# Altium PCB PCB2.PcbDoc
Units mm, origin at the board's own origin, x right, y up, seen from the top; angles counter-clockwise.
Board outline 72.01 x 60.45 mm, 2 copper layers (Top Layer, Bottom Layer); 58 components, 46 nets, 217 pads, 32 vias.
Unrouted connection lines stored in the file: 1.
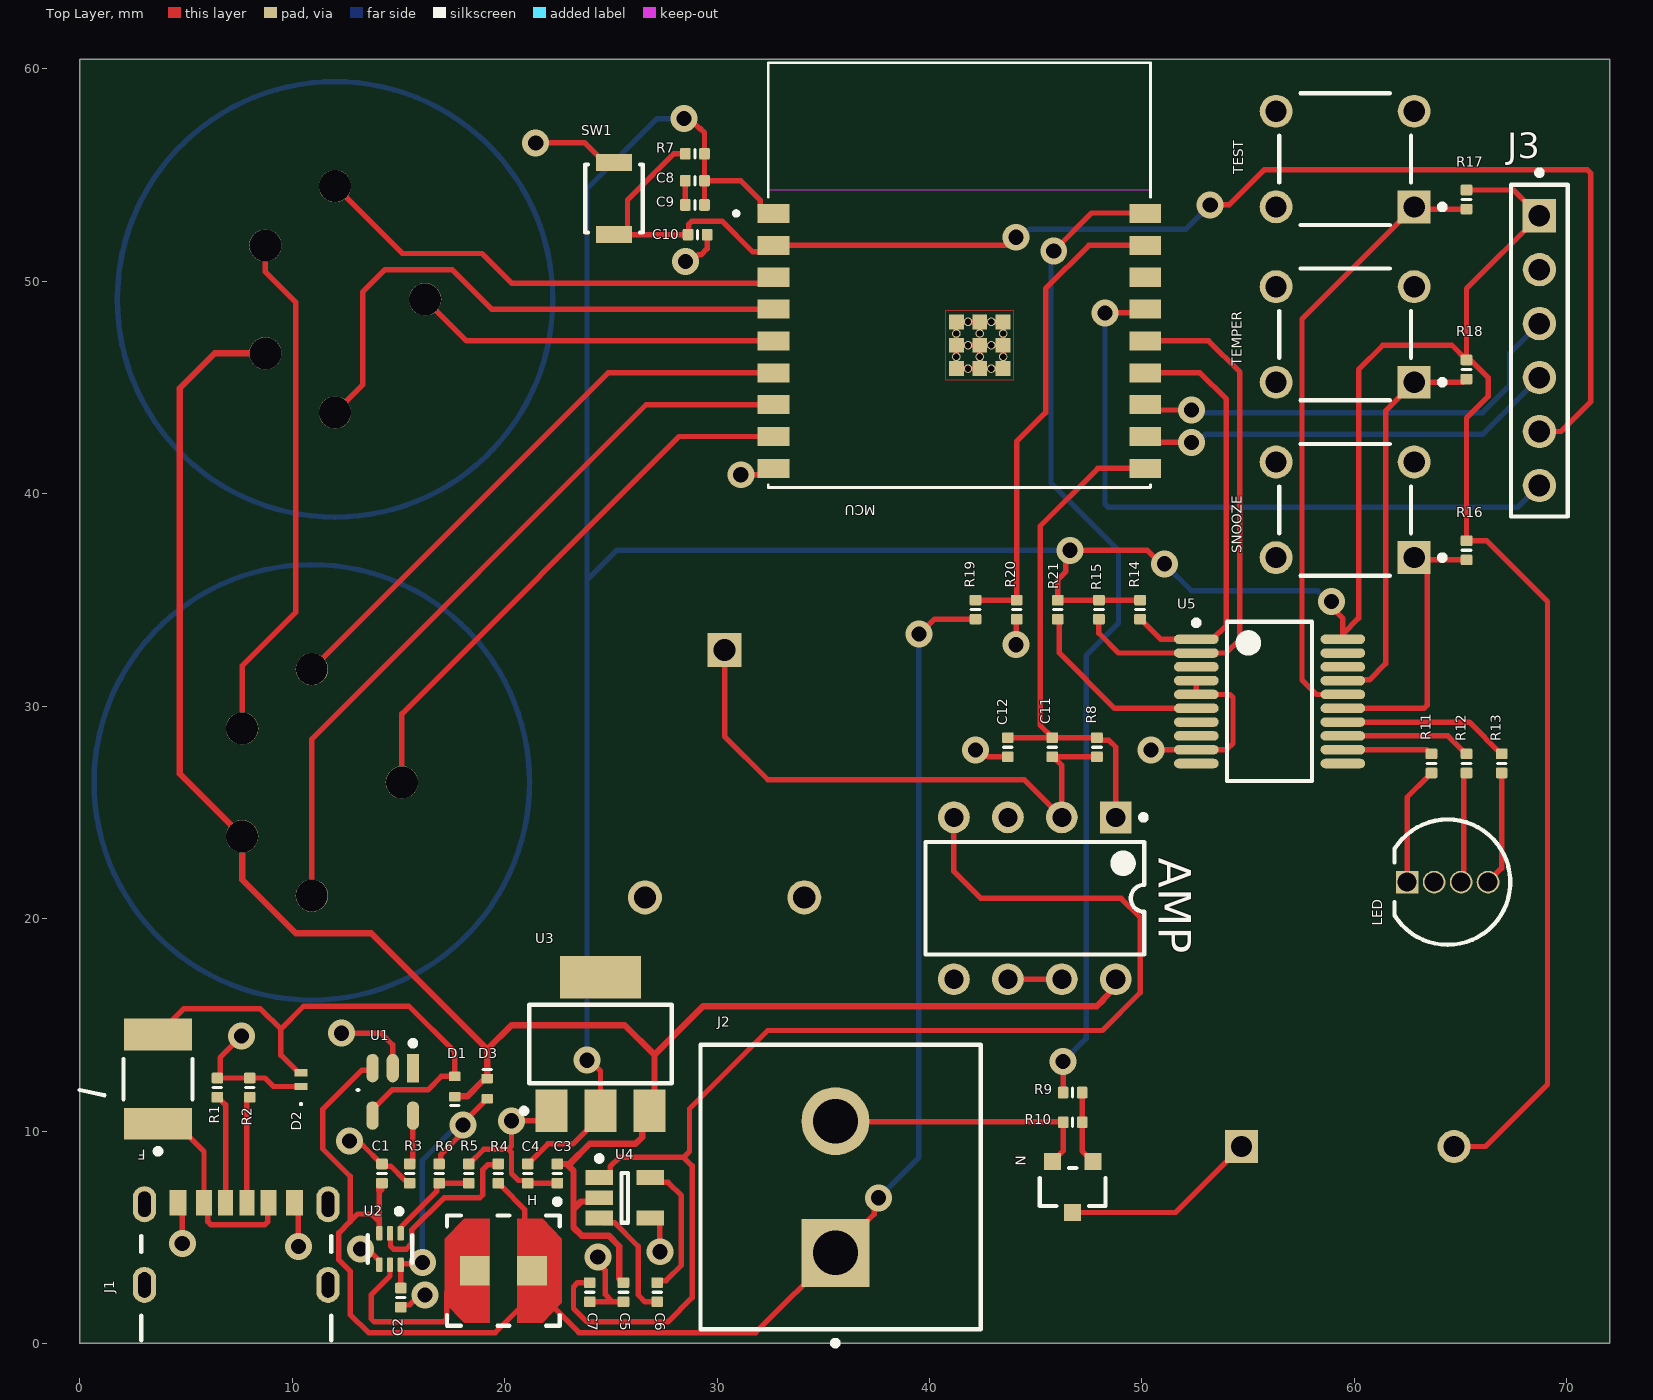
[diagram p0: Top Layer view]
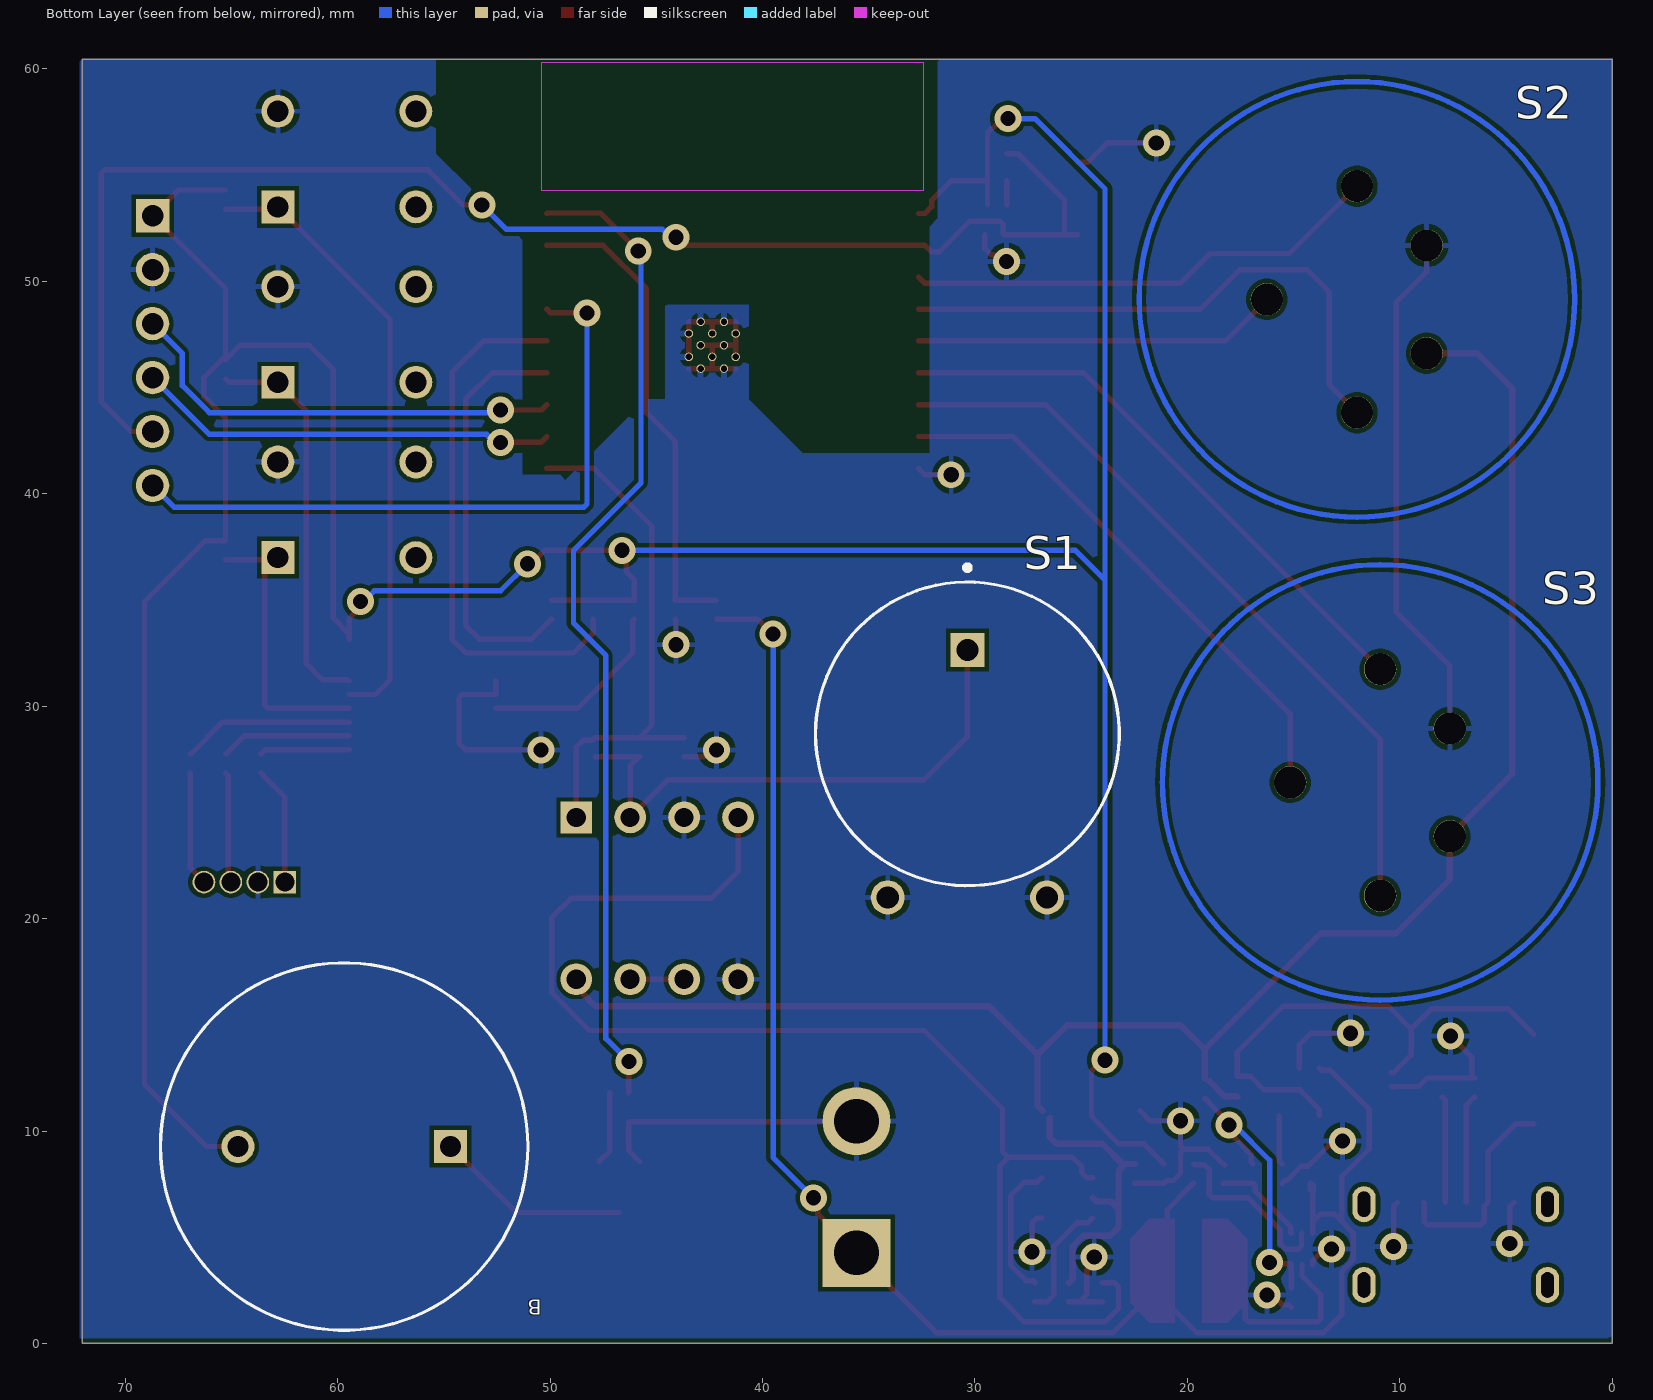
[diagram p1: Bottom Layer view, seen from below]
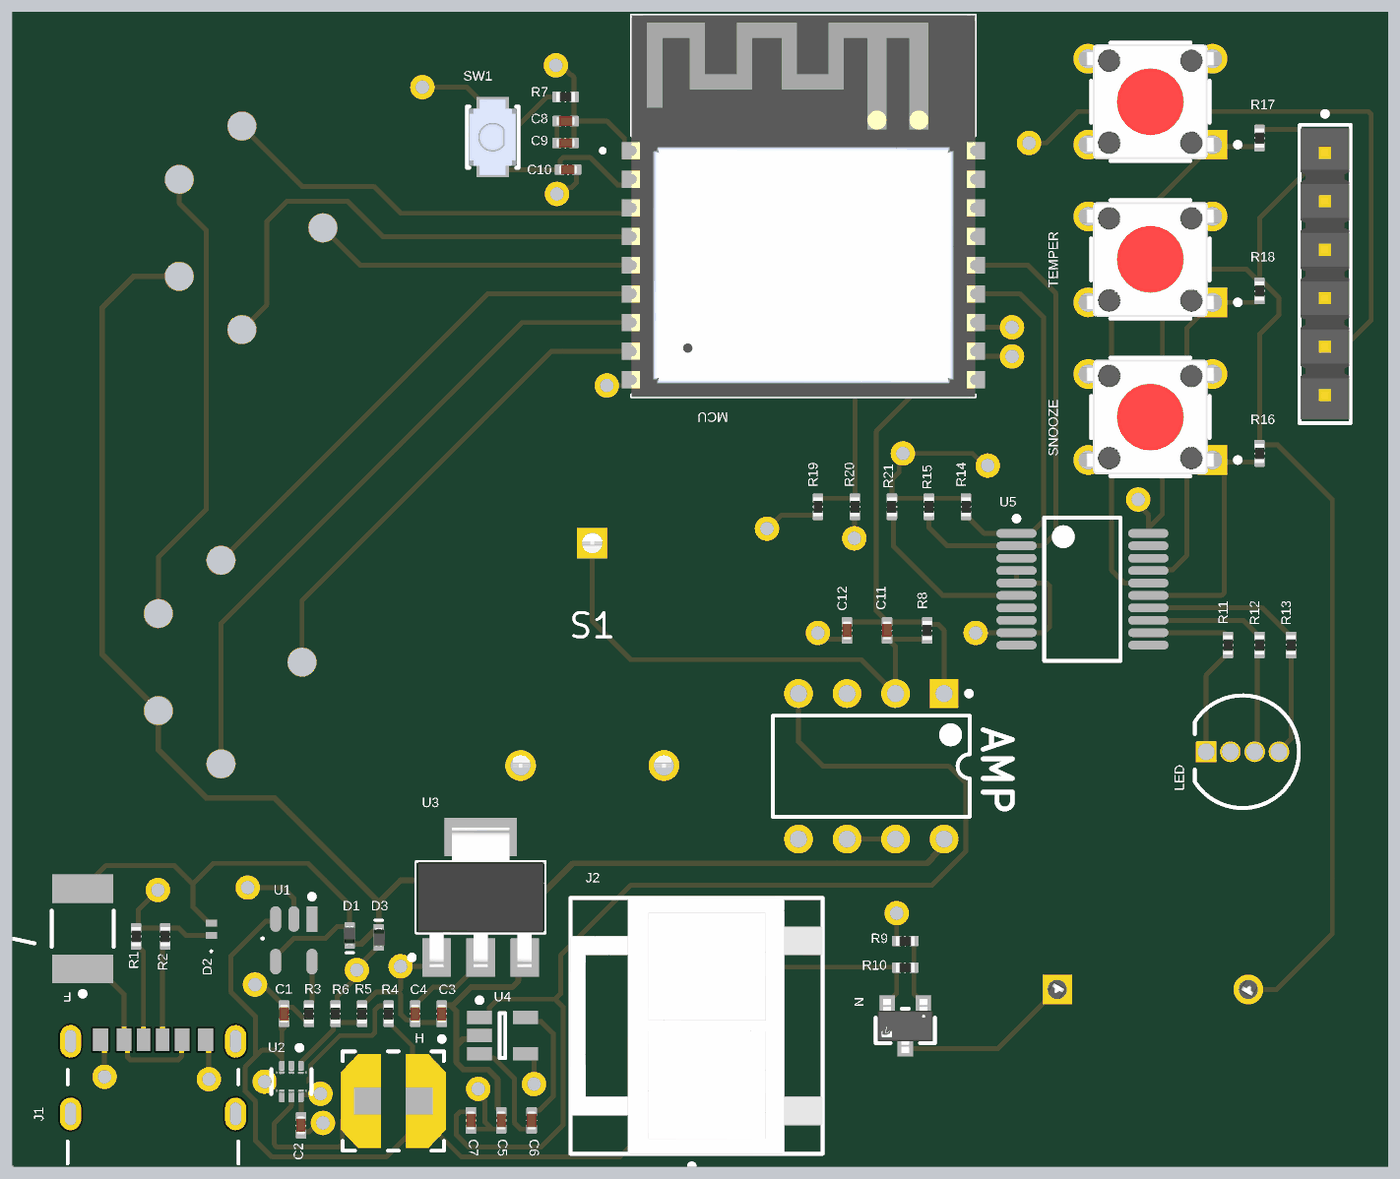
[diagram p2: 3D render of the assembled board from above, using the file's embedded part models]

## Layer stack, top to bottom
Top Solder: solder mask 0.0102, Solder Resist, Dk 3.5
Top Layer: signal copper 0.0356
Dielectric 1: dielectric 0.32, FR-4, Dk 4.8
Bottom Layer: signal copper 0.0356
Bottom Solder: solder mask 0.0102, Solder Resist, Dk 3.5

## Board outline
0,0 0,60.452 72.009,60.452 72.009,0

## Design rules (kind name [scope] priority, off if disabled: settings)
Clearance [All] p1: gap=0.2 ignorepadtopadclearanceinfootprint=TRUE
MinimumSolderMaskSliver J1_SolderMask_Sliver [All] p1: minsoldermaskwidth=0.07
PolygonConnect [All] p1: connectstyle=Relief reliefconductorwidth=0.254 reliefentries=4 polygonreliefangle="90 Angle" airgapwidth=0.254
RoutingVias [All] p1: holewidth=0.711 width=1.27 viastyle="Through Hole" minholewidth=0.711 minwidth=1.27 maxholewidth=0.711 maxwidth=1.27
SilkToSolderMaskClearance [IsPad] p1: minsilkscreentomaskgap=0.1 clearancetoexposedcopper=TRUE
SolderMaskExpansion [All] p1: expansion=0 istentingtop=FALSE
SupplyNets "Schematic Supply Nets" [InNet('GND')] p1: voltage=0.000
Width [InNet('5V')] p1: maxlimit=0.3 minlimit=0.254 preferedwidth=0.3
28 further rules are at their usual default settings.

## Components (designator, comment, footprint, x,y, rotation, side; value= is the part's Value field where it differs from the comment)
AMP "AD708SQ/883B" ADI-Q-8 44.958,20.955 r270 top locked
B "PS1740P02E" FP-PS1740P02E-MFG 59.69,9.271 r0 bottom locked
C1 "Capacitor 1nF +/-20% 50V 0402" CAPC0402(1005)33_L 14.224,8.001 r270 top value=10uF
C2 "Capacitor 1nF +/-20% 50V 0402" CAPC0402(1005)33_L 15.113,2.159 r270 top value=22uF
C3 "Capacitor 1nF +/-20% 50V 0402" CAPC0402(1005)33_L 22.479,8.001 r270 top locked value=10uF
C4 "Capacitor 1nF +/-20% 50V 0402" CAPC0402(1005)33_L 21.088,8.001 r270 top locked value=10uF
C5 "Capacitor 1nF +/-20% 50V 0402" CAPC0402(1005)33_L 25.59,2.413 r270 top value=1uF
C6 "Capacitor 1nF +/-20% 50V 0402" CAPC0402(1005)33_L 27.178,2.413 r270 top locked value=1uF
C7 "Capacitor 1nF +/-20% 50V 0402" CAPC0402(1005)33_L 24.003,2.413 r270 top locked value=1uF
C8 "Capacitor 1nF +/-20% 50V 0402" CAPC0402(1005)33_L 28.956,54.737 r180 top locked value=100nF
C9 "Capacitor 1nF +/-20% 50V 0402" CAPC0402(1005)33_L 28.956,53.594 r180 top locked value=10uF
C10 "Capacitor 1nF +/-20% 50V 0402" CAPC0402(1005)33_L 29.083,52.197 r0 top locked value=10nF
C11 "Capacitor 1nF +/-20% 50V 0402" CAPC0402(1005)33_L 45.783,28.067 r90 top locked value=1uF
C12 "Capacitor 1nF +/-20% 50V 0402" CAPC0402(1005)33_L 43.688,28.067 r90 top locked value=1uF
D1 "RB520CM-30" ROHM-VMN2-2_V 17.653,12.096 r90 top locked
D2 "ESD05V88D-LC" ESD05V88DLC 10.414,12.421 r90 top locked
D3 "RB520CM-30" ROHM-VMN2-2_V 19.177,11.996 r270 top locked
F "MF-MSMF075-2" BOUR-MF-MSMF050-2_V 3.683,12.446 r90 top locked
H "VLCF5028T-2R7N1R8-2" TDK-VLCF5028-2_V 19.939,3.429 r270 top value=1µH
J1 "USB4970-00-A_REVA" GCT_USB4970-00-A_REVA 7.366,3.556 r0 top locked
J2 "B02P-VL (LF)(SN)" FP-B02P-VL_LF_SN-MFG 35.814,7.366 r270 top locked
J3 "MTSW-106-22-L-S-409" FP-MTSW-106-22-L-S-409-MFG 68.707,46.736 r90 top locked
LED "WP154A4SUREQBFZGC" KING-WP154A4SUREQBFZGC_V 64.389,21.717 r90 top locked
MCU "ESP32-C3-WROOM-02-H4" MODULE_ESP32-C3-WROOM-02-H4 41.402,50.292 r0 top locked
N "AO3400A" FP-SOT23-MFG 46.736,7.366 r270 top locked
R1 "Resistor 100K +/-1 % 0402 63 mW" RESC0402(1005)_L 6.477,12.046 r270 top locked value=5.9k
R2 "Resistor 100K +/-1 % 0402 63 mW" RESC0402(1005)_L 8.001,12.046 r270 top locked value=5.9k
R3 "Resistor 100K +/-1 % 0402 63 mW" RESC0402(1005)_L 15.526,8.001 r90 top locked value=2k
R4 "Resistor 100K +/-1 % 0402 63 mW" RESC0402(1005)_L 19.698,8.001 r90 top locked value=100k
R5 "Resistor 100K +/-1 % 0402 63 mW" RESC0402(1005)_L 18.307,8.001 r90 top locked value=100k
R6 "Resistor 100K +/-1 % 0402 63 mW" RESC0402(1005)_L 16.916,8.001 r270 top locked value=732
R7 "Resistor 100K +/-1 % 0402 63 mW" RESC0402(1005)_L 28.956,56.007 r0 top value=10k
R8 "Resistor 100K +/-1 % 0402 63 mW" RESC0402(1005)_L 47.879,28.067 r270 top locked value=1M
R9 "Resistor 100K +/-1 % 0402 63 mW" RESC0402(1005)_L 46.736,11.811 r0 top locked value=100
R10 "Resistor 100K +/-1 % 0402 63 mW" RESC0402(1005)_L 46.736,10.414 r180 top locked value=1k
R11 "Resistor 100K +/-1 % 0402 63 mW" RESC0402(1005)_L 63.627,27.305 r270 top locked value=330
R12 "Resistor 100K +/-1 % 0402 63 mW" RESC0402(1005)_L 65.278,27.305 r270 top locked value=330
R13 "Resistor 100K +/-1 % 0402 63 mW" RESC0402(1005)_L 66.929,27.305 r270 top locked value=330
R14 "Resistor 100K +/-1 % 0402 63 mW" RESC0402(1005)_L 49.911,34.544 r90 top locked value=4.7k
R15 "Resistor 100K +/-1 % 0402 63 mW" RESC0402(1005)_L 47.974,34.544 r270 top locked value=4.7k
R16 "Resistor 100K +/-1 % 0402 63 mW" RESC0402(1005)_L 65.278,37.338 r90 top locked value=10k
R17 "Resistor 100K +/-1 % 0402 63 mW" RESC0402(1005)_L 65.278,53.848 r90 top locked value=10k
R18 "Resistor 100K +/-1 % 0402 63 mW" RESC0402(1005)_L 65.278,45.847 r90 top locked value=10k
R19 "Resistor 100K +/-1 % 0402 63 mW" RESC0402(1005)_L 42.164,34.544 r90 top locked value=100k
R20 "Resistor 100K +/-1 % 0402 63 mW" RESC0402(1005)_L 44.101,34.544 r270 top locked value=100k
R21 "Resistor 100K +/-1 % 0402 63 mW" RESC0402(1005)_L 46.037,34.544 r270 top locked value=10k
S1 "TGS5141-P00" FP-TGS5141-P00-MFG 30.353,28.321 r180 bottom locked
S2 "C1N_2654_40D-Symbol-1" C1N_2654_40D.PcbLib 12.016,49.149 r270 bottom locked
S3 "C1N_2654_40D-Symbol-1" C1N_2654_40D.PcbLib 10.922,26.412 r270 bottom locked
SNOOZE "B3F-1006" FP-B3F-1006-MFG 59.563,39.243 r0 top locked
SW1 "B3U-1000P" FP-B3U-1000P-MFG 25.146,53.897 r270 top locked
TEMPER "B3F-1006" FP-B3F-1006-MFG 59.563,47.498 r0 top locked
TEST "B3F-1006" FP-B3F-1006-MFG 59.563,55.753 r0 top locked
U1 "MCP73831T-2ACI/OT" FP-C04-091-OT-IPC_B 14.732,11.846 r270 top locked
U2 "TPS61023DRLR" FP-DRL0006A-MFG 14.605,4.445 r270 top locked
U3 "NCP1117ST33T3G" ONSC-SOT-223-4-318H-01_A_V 24.511,14.097 r90 top locked
U4 "TPS60403DBVRG4" TI-DBV5_M 25.654,6.858 r0 top locked
U5 "MCP23008-E/SS" SSOP-SS20_N 56.007,30.226 r0 top locked

## Footprints (in the part's own frame and the unit in brackets; to place one, negate y for a bottom-side part, rotate by r counter-clockwise, add the part's x,y. Pads: shape width x height; smd on the part's side, far side on the other; paste and mask are expansions set on the pad)
ADI-Q-8 [mm] "DIP, 8-Leads, Body 10.29x6.73mm, Pitch 2.54mm"
  rect 1.5x1.5 hole 0.9: 1(-3.81,3.81)
  round 1.5 hole 0.9: 2(-3.81,1.27) 3(-3.81,-1.27) 4(-3.81,-3.81) 5(3.81,-3.81) 6(3.81,-1.27) 7(3.81,1.27) 8(3.81,3.81)
  silkscreen extent -3.93,-5.15 2.65,5.24, body extent -3.95,-5.15 3.95,5.15, height 5.08
BOUR-MF-MSMF050-2_V [mm] "SMD, 2-Leads, Body 4.55x3.24mm"
  rect 1.5x3.2 smd: 1(-2.1,0) 2(2.1,0)
  silkscreen extent -3.52,-1.62 0.95,1.62, body extent -2.27,-1.62 2.27,1.62, height 0.85
C1N_2654_40D.PcbLib [mil]
  round 60 hole 59.06: CS(0,-166.93) GND(-100,129.13) RX(209.84,0) TX(-209.84,0) VCC(100,129.13)
  Top Layer circle w10: c0,0 r403.54
CAPC0402(1005)33_L [mm] "Chip Capacitor, Body 1.0x0.5mm, Height 0.33mm, IPC High Density"
  rrect25% 0.5x0.55 smd: 1(-0.45,0) 2(0.45,0)
  silkscreen extent 0,-0.2 0,0.2, body extent -0.5,-0.25 0.5,0.25, height 0.55
ESD05V88DLC [mm]
  rect 0.35x0.6 smd: 1(-0.325,0) 2(0.325,0)
  silkscreen extent -1.2,-0.05 -1.1,0.05
FP-B02P-VL_LF_SN-MFG [mm]
  rect 3.2x3.2 hole 2.1 paste-2539.97 mask+0: 1(3.1,-0.24)
  round 3.2 hole 2.1 paste-2539.97 mask+0: 2(-3.1,-0.24)
  silkscreen extent -6.7,-6.6 7.47,6.6, body extent -6.8,-6.7 6.8,6.7, height 0.25
FP-B3F-1006-MFG [mm]
  rect 1.55x1.55 hole 1 paste-2539.97 mask+0: 1(3.25,-2.25)
  round 1.55 hole 1 paste-2539.97 mask+0: 2(-3.25,-2.25) 3(3.25,2.25) 4(-3.25,2.25)
  silkscreen extent -3.1,-3.1 4.7,3.1, body extent -4.13,-3.2 4.13,3.2, height 0.25
FP-B3U-1000P-MFG [mm]
  rect 0.8x1.7 smd paste+0 mask+0: 1(-1.7,0) 2(1.7,0)
  silkscreen extent -1.6,-1.35 1.6,1.35, body extent -2.2,-1.45 2.2,1.45, height 0.25
FP-C04-091-OT-IPC_B [mm]
  rect 1.338x0.578 smd paste+0 mask+0: 1(-1.116,0.95)
  rrect100% 1.338x0.578 smd paste+0 mask+0: 2(-1.116,0) 3(-1.116,-0.95) 4(1.116,-0.95) 5(1.116,0.95)
  silkscreen extent -2.41,-14.73 11.85,1.08
FP-DRL0006A-MFG [mm]
  rrect33% 0.67x0.3 smd paste+0 mask+0: 1(-0.74,0.5) 2(-0.74,0) 3(-0.74,-0.5) 4(0.74,-0.5) 5(0.74,0) 6(0.74,0.5)
  silkscreen extent -1.9,-1.05 0.65,1.05, body extent -1.17,-1.1 1.17,1.1, height 0.25
FP-MTSW-106-22-L-S-409-MFG [mm]
  rect 1.57x1.57 hole 1.02 paste-2539.97 mask+0: 1(6.35,0)
  round 1.57 hole 1.02 paste-2539.97 mask+0: 2(3.81,0) 3(1.27,0) 4(-1.27,0) 5(-3.81,0) 6(-6.35,0)
  silkscreen extent -7.81,-1.34 8.5,1.34, body extent -7.91,-1.44 7.91,1.44, height 0.25
FP-PS1740P02E-MFG [mm]
  rect 1.55x1.55 hole 1 paste-2539.97 mask+0: 1(-5,0)
  round 1.55 hole 1 paste-2539.97 mask+0: 2(5,0)
  silkscreen extent -8.65,-8.65 8.65,8.65, body extent -8.5,-8.5 8.5,8.5, height 7.8
FP-SOT23-MFG [mm]
  rect 0.8x0.8 smd paste+0 mask+0: 1(-1.2,0.95) 2(-1.2,-0.95) 3(1.2,0)
  silkscreen extent -0.9,-1.55 0.9,1.55, body extent -1.7,-1.78 1.7,1.78, height 0.25
FP-TGS5141-P00-MFG [mm]
  rect 1.6x1.6 hole 1.05 paste-2539.97 mask+0: 1(0,4.325)
  round 1.6 hole 1.05 paste-2539.97 mask+0: 2(-3.75,-7.325) 2(3.75,-7.325)
  silkscreen extent -7.15,-6.77 7.15,8.32, body extent -6.95,-7.43 6.95,7.21, height 7.1
GCT_USB4970-00-A_REVA [mm]
  rect 0.7x1.2 smd paste+0 mask+0.102: A5(-0.5,3.08) B5(0.5,3.08)
  rect 0.76x1.2 smd paste+0 mask+0.102: A9(1.52,3.08) B9(-1.52,3.08)
  rect 0.8x1.2 smd paste+0 mask+0.102: A12(2.75,3.08) B12(-2.75,3.08)
  oval 1.1x1.7 hole 0.6 slot 1.2 at 90 deg mask+0.102: SH1(-4.32,3) SH2(4.32,3) SH3(-4.32,-0.8) SH4(4.32,-0.8)
  silkscreen extent -4.47,-3.4 4.47,1.5
KING-WP154A4SUREQBFZGC_V [mm] "THD, 4-Leads, Dia 5.9mm, Pitch 1.27mm"
  rect 1.07x1.07 hole 0.889 paste-2539.97: 1(0,1.905)
  round 1.07 hole 0.889 paste-2539.97: 2(0,0.635) 3(0,-0.635) 4(0,-1.905)
  silkscreen extent -2.95,-2.95 2.95,2.5
MODULE_ESP32-C3-WROOM-02-H4 [mm]
  rect 1.5x0.9 smd: 1(-8.75,2.9) 2(-8.75,1.4) 3(-8.75,-0.1) 4(-8.75,-1.6) 5(-8.75,-3.1) 6(-8.75,-4.6) 7(-8.75,-6.1) 8(-8.75,-7.6) 9(-8.75,-9.1) 10(8.75,-9.1) 11(8.75,-7.6) 12(8.75,-6.1) 13(8.75,-4.6) 14(8.75,-3.1) 15(8.75,-1.6) 16(8.75,-0.1) 17(8.75,1.4) 18(8.75,2.9)
  rect 0.7x0.7 smd: 19(-0.14,-2.2) 20(0.96,-2.2) 21(2.06,-2.2) 22(-0.14,-3.3) 23(0.96,-3.3) 24(2.06,-3.3) 25(-0.14,-4.4) 26(0.96,-4.4) 27(2.06,-4.4)
  round 0.4 hole 0.3 mask+0: 28(0.41,-2.2) 29(1.51,-2.2) 30(-0.14,-2.75) 31(0.96,-2.75) 32(2.06,-2.75) 33(0.41,-3.3) 34(1.51,-3.3) 35(-0.14,-3.85) 36(0.96,-3.85) 37(2.06,-3.85) 38(0.41,-4.4) 39(1.51,-4.4)
  Keep-Out Layer region: 9,4 -9,4 -9,10 9,10
  Keep-Out Layer region: 9,4 -9,4 -9,10 9,10
  silkscreen extent -10.6,-10 9,10, body extent -9,-10 9,10, height 3.35
ONSC-SOT-223-4-318H-01_A_V [mm] "SOT223, 4-Leads, Body 6.7x3.7mm, Pitch 2.3mm"
  rect 2x1.5 smd: 1(-3.15,2.3) 2(-3.15,0) 3(-3.15,-2.3)
  rect 2x3.8 smd: 4(3.15,0)
  silkscreen extent -3.27,-3.35 1.85,3.72, body extent -3.65,-3.35 3.65,3.35, height 1.8
RESC0402(1005)_L [mm] "Chip Resistor, Body 1.0x0.5mm, IPC High Density"
  rrect25% 0.5x0.55 smd: 1(-0.45,0) 2(0.45,0)
  silkscreen extent 0,-0.2 0,0.2, body extent -0.5,-0.25 0.5,0.25, height 0.3
ROHM-VMN2-2_V [mm] "VMN2, 2-Leads, Body 0.9x0.6mm, Pitch 0.95mm"
  rrect25% 0.45x0.55 smd: 1(-0.475,0) 2(0.475,0)
  silkscreen extent -0.9,-0.2 -0.9,0.2, body extent -0.5,-0.3 0.5,0.3, height 0.37
SSOP-SS20_N [mm] "SOP, 20-Leads, Body 7.2x5.2mm, Pitch 0.65mm, IPC Medium Density"
  oval 2.1x0.45 smd: 1(-3.45,2.925) 2(-3.45,2.275) 3(-3.45,1.625) 4(-3.45,0.975) 5(-3.45,0.325) 6(-3.45,-0.325) 7(-3.45,-0.975) 8(-3.45,-1.625) 9(-3.45,-2.275) 10(-3.45,-2.925) 11(3.45,-2.925) 12(3.45,-2.275) 13(3.45,-1.625) 14(3.45,-0.975) 15(3.45,-0.325) 16(3.45,0.325) 17(3.45,0.975) 18(3.45,1.625) 19(3.45,2.275) 20(3.45,2.925)
  silkscreen extent -3.57,-3.75 2,3.82, body extent -2.8,-3.75 2.8,3.75, height 2
TDK-VLCF5028-2_V [mm] "SMD, 2-Leads, Body 5.2x5.3mm"
  rect 1.4x1.4 smd: 1(0,1.35) 2(0,-1.35)
  Top Layer region: -2.45,0.65 -2.45,1.85 -1.5,2.75 1.5,2.75 2.45,1.85 2.45,0.65
  Top Layer region: -2.45,-0.65 2.45,-0.65 2.45,-1.85 1.5,-2.75 -1.5,-2.75 -2.45,-1.85
  silkscreen extent -3.37,-2.65 2.6,2.67, body extent -2.6,-2.65 2.6,2.65, height 2.8
TI-DBV5_M [mm] "SOT23, 5-Leads, Body 2.9x1.6mm, Pitch 0.95mm, IPC Low Density"
  rect 1.3x0.7 smd: 1(-1.2,0.95) 2(-1.2,0) 3(-1.2,-0.95) 4(1.2,-0.95) 5(1.2,0.95)
  silkscreen extent -1.32,-1.17 0.15,1.97, body extent -0.87,-1.52 0.87,1.53, height 1.45

## Part data
AMP: library part CMP-0384-00320-1, "Double Channel Very High DC Precision Operational Amplifier, 900KHz BW, 300 mV/us SR, Military, 8-pin DIP (Q-8), Tube", Amplifiers Per Package=2, Generic Part Number=AD708, Input Bias Current=0.5nA, Input Offset Voltage=5uV, Manufacturer="Analog Devices", ComponentLink1Description="Manufacturer URL", ComponentLink1URL=http://www.analog.com/en/index.html, ComponentLink2Description=Datasheet, ComponentLink2URL=http://www.analog.com/static/imported-files/data_sheets/AD708.pdf, ComponentLink3Description="Package Specification", ComponentLink3URL=http://www.analog.com/static/imported-files/packages/3925655241313314758Q_8.pdf, DatasheetVersion="Rev. C", Iq/Amp=2.75mA, Mounting Technology="Through Hole", PackageDescription="8-Pin Ceramic Dual In-Line Package, Row spacing 7.62 mm, Pitch 2.54 mm", PackageReference=Q-8, Packing=Tube, PartNumber=AD708SQ/883B, Slew Rate=300mV/us, Small Signal Bandwidth=900KHz, V Span Max=36V, V Span Min=6V
B: library part CMP-08413-000002-1, "AUDIO PIEZO TRANSDUCER 30V TH", Frequency=4kHz, Max Operating Temperature=70°C, Min Operating Temperature=-10°C, Operating Supply Voltage=3V, Package Quantity=1500, Diameter=17mm, Height=7.5mm, Lead Free="Lead Free", Mount="Through Hole", Packaging=Bulk, RoHS Compliant=Yes, Series=PS, Termination="PC Pins", Voltage Rating=3V, Washable=No
C1 C2 C3 C4 C5 C6 C7 C8 C9 C10 C11 C12: library part CMP-001-00066-3, "Chip Capacitor, 1nF +/-20%, 50V, 0402, Thickness 0.33 mm", Case/Package=0402, Max Operating Temperature=85°C, Min Operating Temperature=-55°C, Tolerance=10%, Voltage Rating=50V, Mounting Technology=SMT, Pins=2
D1 D3: library part CMP-004-00028-3, "DIODE SCHOTTKY 30V 100MA VMN2M", Case/Package=SMD/SMT, Mounting Technology=SMT, Pins=2
D2: library part CMP-004-00032-1, "Bi-directional TVS Diode for ESD Protection", Manufacturer_Name="SOCAY Elec", Datasheet Link=https://datasheet.lcsc.com/szlcsc/1902141130_SOCAY-Elec-ESD05V88D-LC_C303803.pdf, Design Item ID=ESD05V88D-LC, Geometry.Height=0.55mm, Manufacturer_Part_Number=ESD05V88D-LC, Source=ESD05V88D-LC.SchLib
F: library part CMP-005-00002-4, "PTC Resettable Fuse, 13.2 V, 750 mA, -40 to 85 degC, 2-Pin SMD, RoHS, Tape and Reel", Case/Package=1812, Current Rating=100A, Manufacturer=Bourns, Max Operating Temperature=85°C, Min Operating Temperature=-40°C, Nominal Supply Voltage=13.2V, Package Description="2-Pin Surface Mount Device, Body 4.55 x 3.24 mm", Package Quantity=2000, Package Reference=MF-MSMF050-2, Resistance=450mohm, Datasheet URL=http://www.bourns.com/docs/Product-Datasheets/mfmsmf.pdf, Datasheet Version="Rev. AG, 08/2016", Lead Pitch=4.73mm, Mounting Technology=SM, Packaging=TapeandReel, RoHS Compliant=True, Voltage Rating=13.2V
H: library part CMP-006-00017-6, "Inductor for Power Circuits, 2.7 uH, +/- 30%,100 KHz, 1.82 A, -40 to 105 degC, 2-Pin SMD, RoHS, Reel", Case/Package=5028, Current Rating=1.82A, Inductance Tolerance=30%, Manufacturer=TDK, Max Operating Temperature=105°C, Min Operating Temperature=-40°C, Package Description="2-Pin Surface Mount Device, Body 5.2 x 5.3 mm", Package Quantity=500, Package Reference=VLCF5028-2, Resistance=0.033Ohm, Core Material=Ferrite, Datasheet URL=https://product.tdk.com/info/en/catalog/datasheets/inductor_commercial_power_vlcf5028-2_en.pdf, Datasheet Version=Apr-16, Mounting Technology=SM, Packaging=TapeandReel, RoHS Compliant=True, Saturation Current=1.82A, Shielding=Shielded, Tolerance=30%
J1: library part CMP-002-00071-1, "Type C USB Charging Connector", Case/Package=None, Check_prices=https://www.snapeda.com/parts/USB4970-00-A/Global+Connector+Technology/view-part/?ref=eda, Component Type=Standard, Design Item ID=USB4970-00-A_REVA, MF="Global Connector Technology", MP=USB4970-00-A, Pins=10, SnapEDA_Link=https://www.snapeda.com/parts/USB4970-00-A/Global+Connector+Technology/view-part/?ref=snap, Source=USB4970-00-A_REVA.SchLib
J2: library part CMP-17439-000534-1, "VL Series, Series Number B02P, 6.2mm Pitch 2 Way 1 Row Straight PCB Header, Through Hole Termination, 20A", Current Rating=20A, Voltage Rating=600V, Contact Material="Copper Alloy", Number of Contacts=2, Number of Rows=1, Orientation=Straight, Pitch=6.2mm, Series=VL, Termination="Through Hole"
J3: library part CMP-02766-001492-1, "Headers & Wire Housings Variable Height PCB HDR Strps, 0.100\" Pitch"
LED: library part CMP-2000-07415-1, "Full Color LED Lamp, Dominant Wavelength RGB 630 / 525 / 465 nm, -40 to 85 degC, 4-Pin THD, RoHS", Color=Red,Green,Blue(RGB), Current - Test=20mA, Manufacturer=Kingbright, Millicandela Rating=1300mcdRed,1700mcdGreen,900mcdBlue, Package / Case=Radial-4Leads, Package Description="4-Pin Through Hole LED, Dia 5.9 mm, Pitch 1.27 mm", Standard Package=500, Voltage - Forward (Vf) (Typ)=1.9VRed,3.3VGreen,3.3VBlue, 3D Model="WP154A4SUREQBFZGW.sldprt /  / WP154A4SUREQBFZGW.pro /  / WP154A4SUREQBFZGW.igs /  / WP154A4SUREQBFZGW.stp", Category=Optoelectronics, Datasheet URL=https://www.kingbrightusa.com/images/catalog/spec/WP154A4SUREQBFZGC.pdf, Datasheet Version="Rev. 5A, 08/2014", Family=LEDIndication-Discrete, Height=8.60mm, Lens Style/Size=RoundwithDomedTop,5mm,T-13/4, Lens Type=Clear, Manufacturer URL=http://www.kingbright.com/, Mounting Technology=ThroughHole, Mounting Type=ThroughHole, Online Catalog=5mm,T-13/4(RGB)RoundwithDomedTopLEDLamp, Other Names="754-1615 / WP154A4SUREQBFZGC-ND", Package Reference=WP154A4SUREQBFZGC, Packaging=Bulk, Viewing Angle=50°, Wavelength - Dominant=630nm,525nm,465nm, Wavelength - Peak=645nm,515nm,460nm
MCU: library part CMP-031-00006-1, "WiFi Modules (802.11) (Engineering Samples) SMD module, ESP32-C3, 4MB SPI flash, PCB antenna, -40 C +105 C", Case/Package=Package, Check_prices=https://www.snapeda.com/parts/ESP32-C3-WROOM-02-H4/Espressif+Systems/view-part/?ref=eda, Component Type=Standard, Design Item ID=ESP32-C3-WROOM-02-H4, MF="Espressif Systems", MP=ESP32-C3-WROOM-02-H4, Pins=39, SnapEDA_Link=https://www.snapeda.com/parts/ESP32-C3-WROOM-02-H4/Espressif+Systems/view-part/?ref=snap, Source=ESP32-C3-WROOM-02-H4.SchLib
N: library part CMP-83955-000006-1, "MOSFET N-CH 30V 5.7A SOT23", Case/Package=SOT-23, Continuous Drain Current (ID)=5.7A, Drain to Source Voltage (Vdss)=30V, Gate to Source Voltage (Vgs)=12V, Input Capacitance=630pF, Max Operating Temperature=150°C, Max Power Dissipation=1.4W, Min Operating Temperature=-55°C, Lead Free="Lead Free", Mount="Surface Mount", Number of Elements=1, Number of Pins=3, Packaging="Tape and Reel", Power Dissipation=1.4W, Radiation Hardening=No, Rds On Max=26.5mR
R1 R2 R3 R4 R5 R6 R7 R8 R9 R10 R11 R12 R13 R14 R15 R16 R17 R18 R19 R20 R21: library part CMP-009-00168-3, "Chip Resistor, 100 kOhms, +/-1 %, 63 mW, -55 to 155 degC, 0402", Case/Package=0402, Max Operating Temperature=155°C, Min Operating Temperature=-55°C, Power=63mW, Tolerance=1%, Pins=2
S1: library part CMP-216788-000002-1, "SENSOR CARBON MONOXIDE", Manufacturer=Figaro, Package=0, Temperature="-10°C to +50°C", Temperature Range High=+50°C, Temperature Range Low=-10°C, Automotive=No, Category=IC, ComponentLink2Description=Datasheet, ComponentLink2URL=https://forum.upverter.com/uploads/short-url/yw5D0XICcjAZudgy1tuLKAt05WH.pdf, Device Class L1=Sensors, Device Class L2=unset, Device Class L3=unset, Height=7.1mm, Manufacturer Part Number=TGS5141-P00, Octopart=https://octopart.com/tgs5141-p00-figaro-103046867, Sensor Output="Analog Voltage"
S2 S3: library part CMP-030-000000-1, Design Item ID=C1N_2654_40D-Symbol-1, Source=C1N-2654-40D.SchLib
SNOOZE TEMPER TEST: library part CMP-08834-000047-1, "SWITCH TACTILE SPST-NO 0.05A 24V", Actuator Color=Red, Contact Current Rating=50mA, Contact Resistance=100mR, Max Operating Temperature=70°C, Max Voltage Rating (DC)=24V, Min Operating Temperature=-25°C, Operating Force=4.9N, Package Quantity=1500, Ratings=IP00, Actuator Length=0.9mm, Actuator Type=Standard, Contact Material=Gold, Contact Plating=Silver, Current Rating=50mA, Depth=6mm, Electrical Life=50000Cycles, Height=4.3mm, Illumination Type=Non-Illuminated, Lead Free="Lead Free", Length=6mm, Max Current Rating=50mA, Mechanical Life=50000Cycles, Mount="Through Hole", Number of Poles=1, Orientation=Straight, Packaging=Bag, Series=B3F, Switch Function=Off-Mom, Switch Travel=0.25mm, Termination="PC Pins", Throw Configuration=SPST, Voltage Rating (DC)=24V, Weight=0.25g, Width=6mm
SW1: library part CMP-2100-03586-2, "SWITCH TACTILE SPST-NO 0.05A 12V", Contact Current Rating=50mA, Contact Resistance=100mR, Insulation Resistance=100MR, Max Operating Temperature=70°C, Max Voltage Rating (DC)=12V, Min Operating Temperature=-25°C, Operating Force=1.5N, Package Quantity=1, Ratings="Dust Proof", Actuator Length=0.4mm, Actuator Type=Standard, Contact Material=Silver, Current Rating=50mA, Depth=2.5mm, Electrical Life=200000Cycles, Height=1.2mm, Illumination Type=Non-Illuminated, Lead Free="Lead Free", Length=4mm, Max Current Rating=50mA, Mechanical Life=200000Cycles, Mount="Surface Mount", Orientation=Straight, Packaging="Tape and Reel", Switch Function=Off-Mom, Switch Travel=0.15mm, Termination=SMD/SMT, Throw Configuration=SPST, Voltage Rating (DC)=12V, Weight=0.000776oz, Width=3mm
U1: library part CMP-0133-00143-2, "IC CONTROLLR LI-ION 4.2V SOT23-5", Case/Package=SOT-23, Drain to Source Resistance=350mR, Max Charge Current=500mA, Max Input Voltage=6V, Max Operating Temperature=85°C, Max Output Voltage=4.5V, Max Power Dissipation=1.54W, Min Operating Temperature=-40°C, Min Output Voltage=4.168V, Min Supply Voltage=3.75V, Output Voltage=4.2V, Voltage Rating=4.534V, Contact Plating=Tin, Height=0.051inch, Lead Free="Lead Free", Length=0.122inch, Max Supply Voltage=6V, Mount="Surface Mount", Number of Cells=1, Number of Channels=1, Number of Outputs=1, Number of Pins=5, Output Current=500mA, Packaging="Tape and Reel", Radiation Hardening=No, REACH SVHC="No SVHC", Termination=SMD/SMT, Weight=0.00709oz, Width=0.071inch
U2: library part CMP-04918-000638-1, "FINISH GOODS FOR TPS61023"
U3: library part CMP-019-00030-3, "Low-Dropout Positive Fixed Voltage Regulator, 1 A, 3.3 V Output Voltage, 0 to 125 degC, 4-Pin SOT-223 (318H-01), Pb-Free, Tape and Reel", Case/Package=SOT-223-4, Dropout Voltage=1.1V, Manufacturer="ON Semiconductor", Max Input Voltage=20V, Max Operating Temperature=125°C, Max Ouput Current=1A, Max Supply Voltage=15V, Min Input Voltage=3.5V, Min Operating Temperature=0°C, Min Supply Voltage=4.75V, Nominal Output Voltage=3.3V, Package Description="4-Pin Small Outline Transistor, Body 6.5 x 3.5 mm, Pitch 2.3 mm", Package Quantity=4000, Package Reference=SOT-223-4-318H-01_A, Datasheet URL=http://www.onsemi.com/pub_link/Collateral/NCP1117-D.PDF, Datasheet Version="Rev. 27, 09/2014", Manufacturer URL=http://www.onsemi.com/, Mounting Technology=SM, Output Current=1A, Output Voltage=3.3V, Outputs=1, Packaging=TapeandReel, Pins=3, RoHS Compliant=True
U4: library part CMP-0391-00007-1, "-1.8 to -5.25 V, Inverting Charge Pump Regulator, 60 mA, 1.8 to 5.25 V Input with 2-Cell Alkaline / Nixx Input, -40 to 85 degC, 5-pin SOT23 (DBV5), Green (RoHS & no Sb/Br)", Manufacturer="Texas Instruments", Switching Frequency(Max)(kHz)=300, 2-Cell Alkaline/Nixx Input=TRUE, Code_JEDEC=MO-178, ComponentLink1Description="Manufacturer URL", ComponentLink1URL=http://www.ti.com/, ComponentLink2Description=Datasheet, ComponentLink2URL=http://www.ti.com/general/docs/lit/getliterature.tsp?genericPartNumber=TPS60403&fileType=pdf, ComponentLink3Description="Package Specification", ComponentLink3URL=http://www.ti.com/litv/pdf/mpds018i, DatasheetVersion=SLVS324A, Eco-Plan="Green (RoHS & no Sb/Br)", Efficiency(Typ)(%)=99, Iout(Max)(A)=0.06, Iq(Typ)(mA)=0.425, Mounting Technology="Surface Mount", PackageDescription="5-Pin Plastic Small Outline, Body 1.60 Ãƒâ€” 2.90 mm, Pitch 0.95 mm", PackageReference=DBV5, PackageVersion=4073253-4/K, PartNumber=TPS60403DBVRG4, Topology="Inverting Buck/Boost", Vin(Max)(V)=5.25, Vin(Min)(V)=1.8, Vout(Max)(V)=-5.25, Vout(Min)(V)=-1.8
U5: library part CMP-0186-00169-3, "8-Bit I/O Expander with Serial Interface, 20-Pin SSOP, Extended Temperature", Code_JEDEC=MO-150, ComponentLink1Description="Manufacturer URL", ComponentLink1URL=http://www.microchip.com/, ComponentLink2Description=Datasheet, ComponentLink2URL=http://ww1.microchip.com/downloads/en/DeviceDoc/21919e.pdf, ComponentLink3Description="Package Specification", ComponentLink3URL=http://www.microchip.com/stellent/groups/techpub_sg/documents/packagingspec/en012702.pdf, DatasheetVersion="revE, Aug-2007", PackageDescription="20-Lead Plastic Shrink Small Outline (SS) - 5.3mm Body [SSOP]", PackageReference=SSOP-SS20, PackageVersion="revBB, Aug-2009", RevisionNote="Sch corrected."

## Via types
v1: diameter 1.27, hole 0.711, Top Layer to Bottom Layer, 32 vias

## Nets (pads, with @x,y where several pads share a name; then routed paths per layer and width w, separated by ;. In a path a pad name is that pad's centre, name@x,y a point inside that pad or via, vN(x,y) a via of type N, cw(c..) or ccw(c..) an arc to the next point about the centre after c; other vN are vias at no path point)
3V3: B.2 C4.1 C8.1 C9.1 J3.1 MCU.1 R7.2 R14.2 R15.1 R16.2 R17.2 R18.2 R21.1 U3.2 U5.20 | length 181.5
  Top Layer w0.254: C4.1 21.113,8.451 21.236,8.574 21.236,8.599 22.035,9.398 23.212,9.398 24.511,10.697 U3.2 24.511,12.827 24.003,13.335 v1(23.876,13.335) ; v1(28.448,57.658) 28.723,57.658 29.202,57.179 29.226,57.179 29.406,57 R7.2 C8.1 ; C9.1 C8.1 ; MCU.1 32.36,53.192 32.037,53.515 32.037,53.807 31.107,54.737 C8.1 ; v1(46.609,37.338) v1@46.736,37.211 ; R14.2 R15.1 R21.1 46.038,35.965 46.415,36.342 46.415,36.89 v1@46.736,37.211 ; v1(51.054,36.703) 50.887,36.703 50.252,37.338 46.863,37.338 v1@46.736,37.211 ; v1(58.928,34.925) 58.928,34.65 59.457,34.121 59.457,33.405 ; U5.20 59.457,33.405 ; B.2 66.167,9.271 69.088,12.192 69.088,34.925 66.225,37.788 R16.2 65.278,43.561 66.294,44.577 66.294,45.466 65.278,46.482 65.278,49.657 J3.1 67.495,54.298 R17.2 ; R18.2 64.585,46.99 61.341,46.99 60.198,45.847 60.198,34.146 59.457,33.405
  Bottom Layer w0.254: v1(23.876,13.335) 23.876,35.941 ; v1(28.448,57.658) 27.178,57.658 23.876,54.356 23.876,35.941 ; v1(46.609,37.338) 25.273,37.338 23.876,35.941 ; v1(51.054,36.703) 52.324,35.433 58.271,35.433 58.779,34.925 v1(58.928,34.925)
5V: AMP.8 C3.1 C5.1 D1.1 D3.1 S2.VCC S3.VCC U3.3 U4.2 | length 96.2
  Top Layer w0.3: S2.VCC 6.35,46.609 4.699,44.958 4.699,26.815 S3.VCC 7.642,21.822 10.16,19.304 13.716,19.304 19.177,13.843 ; D1.1 17.677,11.645 18.249,11.645 D3.1@18.947,12.343 ; D3.1 19.177,13.843 ; C3.1 23.056,8.451 24.003,9.398 26.162,9.398 26.479,9.715 U3.3@26.479,10.615 ; 22.958,8.411 23.241,8.128 23.241,6.328 ; U4.2 24.277,6.681 23.594,6.681 23.241,6.328 ; C5.1 25.566,2.863 25.443,2.986 25.443,3.011 25.4,3.053 25.4,4.572 24.892,5.08 23.622,5.08 23.241,5.461 23.241,6.328 ; U3.3 27.051,11.187 27.051,13.589 ; AMP.8 48.768,16.808 48.17,16.21 48.17,16.166 47.879,15.875 29.337,15.875 27.051,13.589 ; 19.177,13.843 20.32,14.986 25.654,14.986 27.051,13.589
-5V: AMP.4 C7.1 U4.1 | length 61.1
  Top Layer w0.254: C7.1 23.437,2.863 23.241,2.667 23.241,1.651 23.876,1.016 27.686,1.016 28.829,2.159 28.829,8.36 28.426,8.763 ; U4.1 24.746,7.808 24.969,8.031 24.969,8.323 25.409,8.763 28.426,8.763 ; AMP.4 41.148,22.225 42.418,20.955 49.022,20.955 49.911,20.066 49.911,16.51 48.133,14.732 32.385,14.732 28.702,11.049 28.702,9.039 28.426,8.763
BAT+: C1.2 H.1 J2.1 R4.1 R19.1 U1.3 U2.3 | length 82.9
  Top Layer w0.254: U1.3 13.673,12.853 13.261,12.853 11.43,11.022 11.43,9.166 12.724,7.872 12.724,5.739 ; 14.076,7.211 14.076,7.428 14.199,7.551 C1.2 ; U2.3 14.105,5.72 ; C1.2@14.224,7.455 14.224,7.239 14.105,7.12 14.105,5.72 ; R4.1 19.723,7.551 19.846,7.428 19.846,7.403 20.955,6.294 H.1@20.955,3.429 ; v1(37.592,6.858) 37.398,6.664 37.398,6.09 J2.1 31.816,0.508 23.495,0.508 21.632,2.371 21.421,2.371 19.558,0.508 13.589,0.508 12.724,1.373 12.724,3.405 12.192,3.937 12.192,5.207 12.724,5.739 ; v1(39.497,33.401) 39.548,33.401 40.241,34.094 R19.1 ; 12.724,5.739 13.081,6.096 13.729,6.096 14.105,5.72
  Bottom Layer w0.254: v1(37.592,6.858) 39.497,8.763 v1(39.497,33.401)
EN: C10.1 J3.5 MCU.2 R7.1 SW1.2 | length 67.8
  Top Layer w0.254: SW1.2 SW1.2@25.781,52.197 ; R7.1 27.969,56.007 25.781,53.819 SW1.2@25.781,52.197 ; v1(44.069,52.073) 43.688,51.692 32.352,51.692 32.051,51.391 31.67,51.391 30.229,52.832 28.815,52.832 28.666,52.683 28.666,52.23 C10.1 SW1.2@25.781,52.197 ; v1(53.213,53.594) 54.102,53.594 55.753,55.245 70.971,55.245 71.12,55.096 71.12,44.323 69.724,42.927 J3.5 J3.5
  Bottom Layer w0.254: v1(44.069,52.073) 44.344,52.073 44.722,52.451 52.07,52.451 v1(53.213,53.594)
GND: AMP.3 AMP.5 C1.1 C2.2 C3.2 C4.2 C5.2 C7.2 C10.2 C12.1 D2.1 J1.A12 J1.B12 J2.2 J3.2 LED.2 MCU.9 MCU.19 MCU.20 MCU.21 MCU.22 MCU.23 MCU.24 MCU.25 MCU.26 MCU.27 MCU.28 MCU.29 MCU.30 MCU.31 MCU.32 MCU.33 MCU.34 MCU.35 MCU.36 MCU.37 MCU.38 MCU.39 N.2 R1.1 R2.1 R3.1 R5.2 R10.2 R20.2 S1.2 S2.GND S3.GND SNOOZE.3 SW1.1 TEMPER.3 TEST.3 U1.2 U2.4 U3.1 U4.4 U5.4 U5.5 U5.9 | length 103.4
  Top Layer w0.254: J1.B12 4.826,6.426 v1(4.826,4.699) ; v1(7.62,14.478) 6.604,13.462 6.604,12.619 6.481,12.496 R1.1 R2.1 8.713,12.496 9.113,12.096 D2.1 10.335,12.096 D2.1@10.287,12.048 ; S3.GND 7.642,31.899 10.16,34.417 10.16,49.022 8.736,50.446 S2.GND ; J1.A12 10.287,6.465 v1(10.287,4.572) ; v1(12.319,14.605) 14.187,14.605 14.732,14.06 U1.2 ; v1(12.7,9.525) 12.894,9.331 13.319,9.331 14.199,8.451 C1.1@14.249,8.451 ; v1(13.208,4.445) 13.402,4.251 13.744,4.251 14.105,3.89 U2.4 ; C1.1 14.329,8.346 14.638,8.346 15.31,7.674 15.403,7.674 R3.1 ; C2.2 15.217,1.813 15.529,1.813 16.002,2.286 v1(16.256,2.286) ; R5.2@18.238,8.382 R5.2 18.332,8.451 19.025,9.144 20.171,9.144 ; v1(21.463,56.515) 23.778,56.515 24.696,55.597 SW1.1 ; U3.1 21.747,10.483 v1(20.32,10.483) 20.32,9.293 20.171,9.144 ; C3.2 C4.2 20.965,7.674 20.647,7.674 20.32,8.001 20.32,8.995 20.171,9.144 ; C7.2 25.088,1.963 ; v1(24.384,4.064) 24.384,3.789 24.732,3.441 24.732,2.319 25.088,1.963 ; C5.2 25.088,1.963 ; U4.4 27.082,5.908 27.305,5.685 v1(27.305,4.318) ; v1(28.506,50.927) 28.781,50.927 29.102,51.248 29.24,51.248 29.533,51.541 C10.2 ; v1(31.115,40.894) 32.354,40.894 MCU.9 ; J2.2 35.6,10.44 46.26,10.44 R10.2 46.286,9.066 N.2 ; MCU.25 MCU.38 MCU.26 ; MCU.35 MCU.22 ; v1(42.164,27.94) 42.439,27.94 42.762,27.617 C12.1 ; MCU.31 MCU.20 ; MCU.34 MCU.23 ; MCU.27 MCU.39 MCU.26 ; MCU.37 MCU.24 MCU.32 MCU.21 MCU.29 MCU.20 ; v1(44.069,32.893) 44.085,32.909 44.085,34.078 R20.2 ; v1(50.419,27.94) 50.425,27.946 52.552,27.946 U5.9 53.986,27.951 54.285,28.25 54.285,30.402 54.136,30.551 U5.5 U5.4 ; MCU.22 MCU.33 MCU.23 ; MCU.22 MCU.30 MCU.19 MCU.28 MCU.20 ; MCU.26 MCU.36 MCU.23
IO0: MCU.18 R9.1 | length 47.1
  Top Layer w0.254: v1(45.847,51.435) 47.625,53.213 50.131,53.213 MCU.18 ; R9.1 v1(46.286,13.266)
  Bottom Layer w0.254: v1(45.847,51.435) 45.72,51.308 45.72,40.513 48.895,37.338 48.895,33.909 47.371,32.385 47.371,14.351 v1(46.286,13.266)
IO1: MCU.17 R19.2 R20.1 | length 22.7
  Top Layer w0.254: R19.2 R20.1 44.101,42.45 45.466,43.815 45.466,49.657 47.501,51.692 MCU.17
IO3: J3.6 MCU.15 | length 31.9
  Top Layer w0.254: v1(48.26,48.514) 49.974,48.514 MCU.15
  Bottom Layer w0.254: v1(48.26,48.514) 48.26,39.519 48.409,39.37 67.691,39.37 J3.6
IO4: MCU.3 S2.TX | length 22.6
  Top Layer w0.254: S2.TX 15.187,51.308 18.923,51.308 20.32,49.911 32.371,49.911 MCU.3
IO5: MCU.4 S2.RX | length 26.8
  Top Layer w0.254: S2.RX 13.316,45.119 13.316,49.489 14.373,50.546 17.526,50.546 19.38,48.692 MCU.4
IO6: MCU.5 S2.CS | length 17.2
  Top Layer w0.254: S2.CS 18.213,47.192 MCU.5
IO7: MCU.6 S3.TX | length 27.5
  Top Layer w0.254: S3.TX 24.872,45.692 MCU.6
IO8: MCU.7 S3.RX | length 35.6
  Top Layer w0.254: S3.RX 10.922,28.448 26.666,44.192 MCU.7
IO9: MCU.8 S3.CS | length 26.1
  Top Layer w0.254: S3.CS 15.162,29.64 28.214,42.692 MCU.8
IO10: AMP.1 C11.2 C12.2 MCU.10 R8.1 | length 24.7
  Top Layer w0.254: C12.2 C11.2 45.212,29.088 45.212,38.481 47.923,41.192 MCU.10 ; C11.2@45.931,28.517 R8.1 48.002,28.394 48.441,28.394 48.768,28.067 AMP.1
IO18: MCU.13 R14.1 U5.1 | length 19.7
  Top Layer w0.254: R14.1 49.936,34.094 50.879,33.151 53.329,33.151 53.975,33.797 53.975,44.45 52.733,45.692 MCU.13
IO19: MCU.14 R15.2 U5.2 | length 25.6
  Top Layer w0.254: R15.2 47.974,33.433 48.906,32.501 U5.2 53.964,32.501 54.61,33.147 54.61,45.72 53.138,47.192 MCU.14
NetAMP_2: AMP.2 C11.1 R8.2 S1.1 | length 26.7
  Top Layer w0.254: S1.1 30.353,28.575 32.385,26.543 44.45,26.543 AMP.2 46.228,27.198 45.808,27.617 C11.1 R8.2
NetAMP_6: AMP.6 AMP.7 | length 2.5
  Top Layer w0.254: AMP.6 AMP.7
NetB_1: B.1 N.3 | length 9.2
  Top Layer w0.254: N.3 51.585,6.166 B.1
NetC2_1: C2.1 D3.2 R6.1 U2.6 | length 13.4
  Top Layer w0.254: U2.6 15.105,3.734 15.128,3.757 16.076,3.757 v1(16.129,3.81) ; C2.1 U2.6@15.113,3.651 ; R6.1 16.996,8.531 16.996,8.89 17.84,9.733 17.84,10.093 v1(18.034,10.287) ; v1@18.139,10.392 18.139,10.483 19.029,11.373 19.029,11.423 19.127,11.521 D3.2
  Bottom Layer w0.254: v1(16.129,3.81) 16.129,8.626 17.79,10.287 v1(18.034,10.287)
NetC6_1: C6.1 U4.5 | length 6.6
  Top Layer w0.254: U4.5 27.077,7.585 27.699,7.585 28.321,6.963 28.321,3.683 27.599,2.961 27.276,2.961 C6.1
NetC6_2: C6.2 U4.3 | length 5.7
  Top Layer w0.254: U4.3 24.677,5.685 25.176,5.685 26.289,4.572 26.289,2.286 26.612,1.963 C6.2
NetC8_2: C8.2 C9.2 | length 1.1
  Top Layer w0.254: C9.2 C8.2
NetD1_2: D1.2 D2.2 F.2 U1.4 | length 24.7
  Top Layer w0.254: F.2 4.887,15.75 8.509,15.75 9.462,14.796 ; D2.2 10.289,12.746 9.462,13.573 9.462,14.796 ; U1.4 13.782,11.022 14.032,11.272 14.037,11.272 14.703,11.938 16.383,11.938 17.016,12.571 D1.2 17.653,13.716 15.494,15.875 10.541,15.875 9.462,14.796
NetF_1: F.1 J1.A9 J1.B9 | length 9.9
  Top Layer w0.254: F.1 4.533,10.346 5.846,9.033 J1.B9 6.029,6.453 6.029,5.737 6.178,5.588 8.702,5.588 8.851,5.737 8.851,6.601 J1.A9
NetH_2: H.2 U2.5 | length 7.8
  Top Layer w0.254: U2.5 14.605,3.175 13.716,2.286 13.716,1.165 13.865,1.016 17.123,1.016 17.272,1.165 17.272,2.413
NetJ1_A5: J1.A5 R1.2 | length 5.1
  Top Layer w0.254: R1.2 6.502,11.596 6.866,11.232 J1.A5
NetJ1_B5: J1.B5 R2.2 | length 5
  Top Layer w0.254: J1.B5 7.866,11.473 7.989,11.596 R2.2
NetLED_1: LED.1 R11.2 | length 5.6
  Top Layer w0.254: LED.1 62.484,25.712 63.479,26.707 63.479,26.732 63.602,26.855 R11.2
NetLED_3: LED.3 R12.2 | length 5.2
  Top Layer w0.254: LED.3 65.151,21.844 65.151,26.732 65.274,26.855 R12.2
NetLED_4: LED.4 R13.2 | length 5.4
  Top Layer w0.254: LED.4 66.294,21.742 66.929,22.377 R13.2
NetN_1: N.1 R9.2 R10.1 | length 3.5
  Top Layer w0.254: R9.2 47.186,9.066 N.1
NetR3_2: R3.2 U1.5 | length 2.4
  Top Layer w0.254: R3.2 15.551,8.451 15.682,8.582 U1.5
NetR4_2: R4.2 U2.2 | length 8.5
  Top Layer w0.254: U2.2 14.628,5.162 14.628,4.594 14.777,4.445 15.367,4.445 15.621,4.699 15.621,5.334 17.145,6.858 18.827,6.858 18.976,7.007 18.976,8.181 19.212,8.417 19.664,8.417 R4.2
NetR5_1: R5.1 R6.2 U2.1 | length 4.5
  Top Layer w0.254: U2.1 15.128,5.208 15.128,5.484 16.796,7.152 16.796,7.431 R6.2 ; R6.2@16.891,7.551 R5.1
NetR11_1: R11.1 U5.12 | length 4.3
  Top Layer w0.254: U5.12 63.406,27.951 63.602,27.755 R11.1
NetR12_1: R12.1 U5.13 | length 6.2
  Top Layer w0.254: U5.13 64.407,28.601 65.253,27.755 R12.1
NetR13_1: R13.1 U5.14 | length 8.1
  Top Layer w0.254: U5.14 65.408,29.251 66.904,27.755 R13.1
NetR21_2: R21.2 U5.6 | length 9.1
  Top Layer w0.254: R21.2 46.109,34.022 46.109,32.504 48.712,29.901 U5.6
P3: R16.1 SNOOZE.1 U5.15 | length 13.7
  Top Layer w0.254: U5.15 63.28,29.901 63.429,30.05 63.429,36.377 SNOOZE.1 62.918,36.888 R16.1
P4: R17.1 TEST.1 U5.16 | length 29.2
  Top Layer w0.254: U5.16 58.222,30.551 57.531,31.242 57.531,48.221 TEST.1 62.918,53.398 R17.1
P5: R18.1 TEMPER.1 U5.17 | length 18.7
  Top Layer w0.254: U5.17 59.494,31.238 60.702,31.238 61.468,32.004 61.468,43.903 TEMPER.1 65.104,45.248 65.253,45.397 R18.1
RXD: J3.4 MCU.11 | length 19.9
  Top Layer w0.254: MCU.11 50.426,42.418 v1(52.324,42.418)
  Bottom Layer w0.254: v1(52.324,42.418) 52.599,42.418 52.98,42.799 66.04,42.799 J3.4
TXD: J3.3 MCU.12 | length 21.3
  Top Layer w0.254: MCU.12 50.402,43.942 v1(52.324,43.942)
  Bottom Layer w0.254: v1(52.324,43.942) 52.451,43.815 66.04,43.815 67.31,45.085 67.31,46.609 J3.3
pads on no net: J1.SH1 J1.SH2 J1.SH3 J1.SH4 MCU.16 SNOOZE.2 SNOOZE.4 TEMPER.2 TEMPER.4 TEST.2 TEST.4 U1.1 U3.4 U5.3 U5.7 U5.8 U5.10 U5.11 U5.18 U5.19

## Polygon pours and split planes (outlines as drawn)
GND on Bottom Layer "GND_L02_P001" (solid, pour order 1): 0,60.452 31.623,60.452 31.75,60.325 31.75,52.959 32.131,52.578 32.131,41.91 38.1,41.91 40.64,44.45 40.64,48.895 44.45,48.895 44.577,49.022 44.577,44.45 45.466,44.45 49.276,40.64 49.53,40.894 51.308,40.894 51.308,51.943 55.372,56.007 55.372,60.452 72.009,60.452 72.136,60.325 72.136,0.254 0.254,0.254 0,0 0,60.579 0.127,60.706
GND on Top Layer "GND_L01_P000" (solid, pour order 0): 40.767,48.641 43.942,48.641 43.942,45.339 40.767,45.339